# Altium PCB wifi_car.PcbDoc (part 2 of 5)
Units mm, origin at the board's own origin, x right, y up, seen from the top; angles counter-clockwise.
Board outline 68.55 x 80.89 mm, 2 copper layers (Top Layer, Bottom Layer); 133 components, 98 nets, 473 pads, 106 vias.
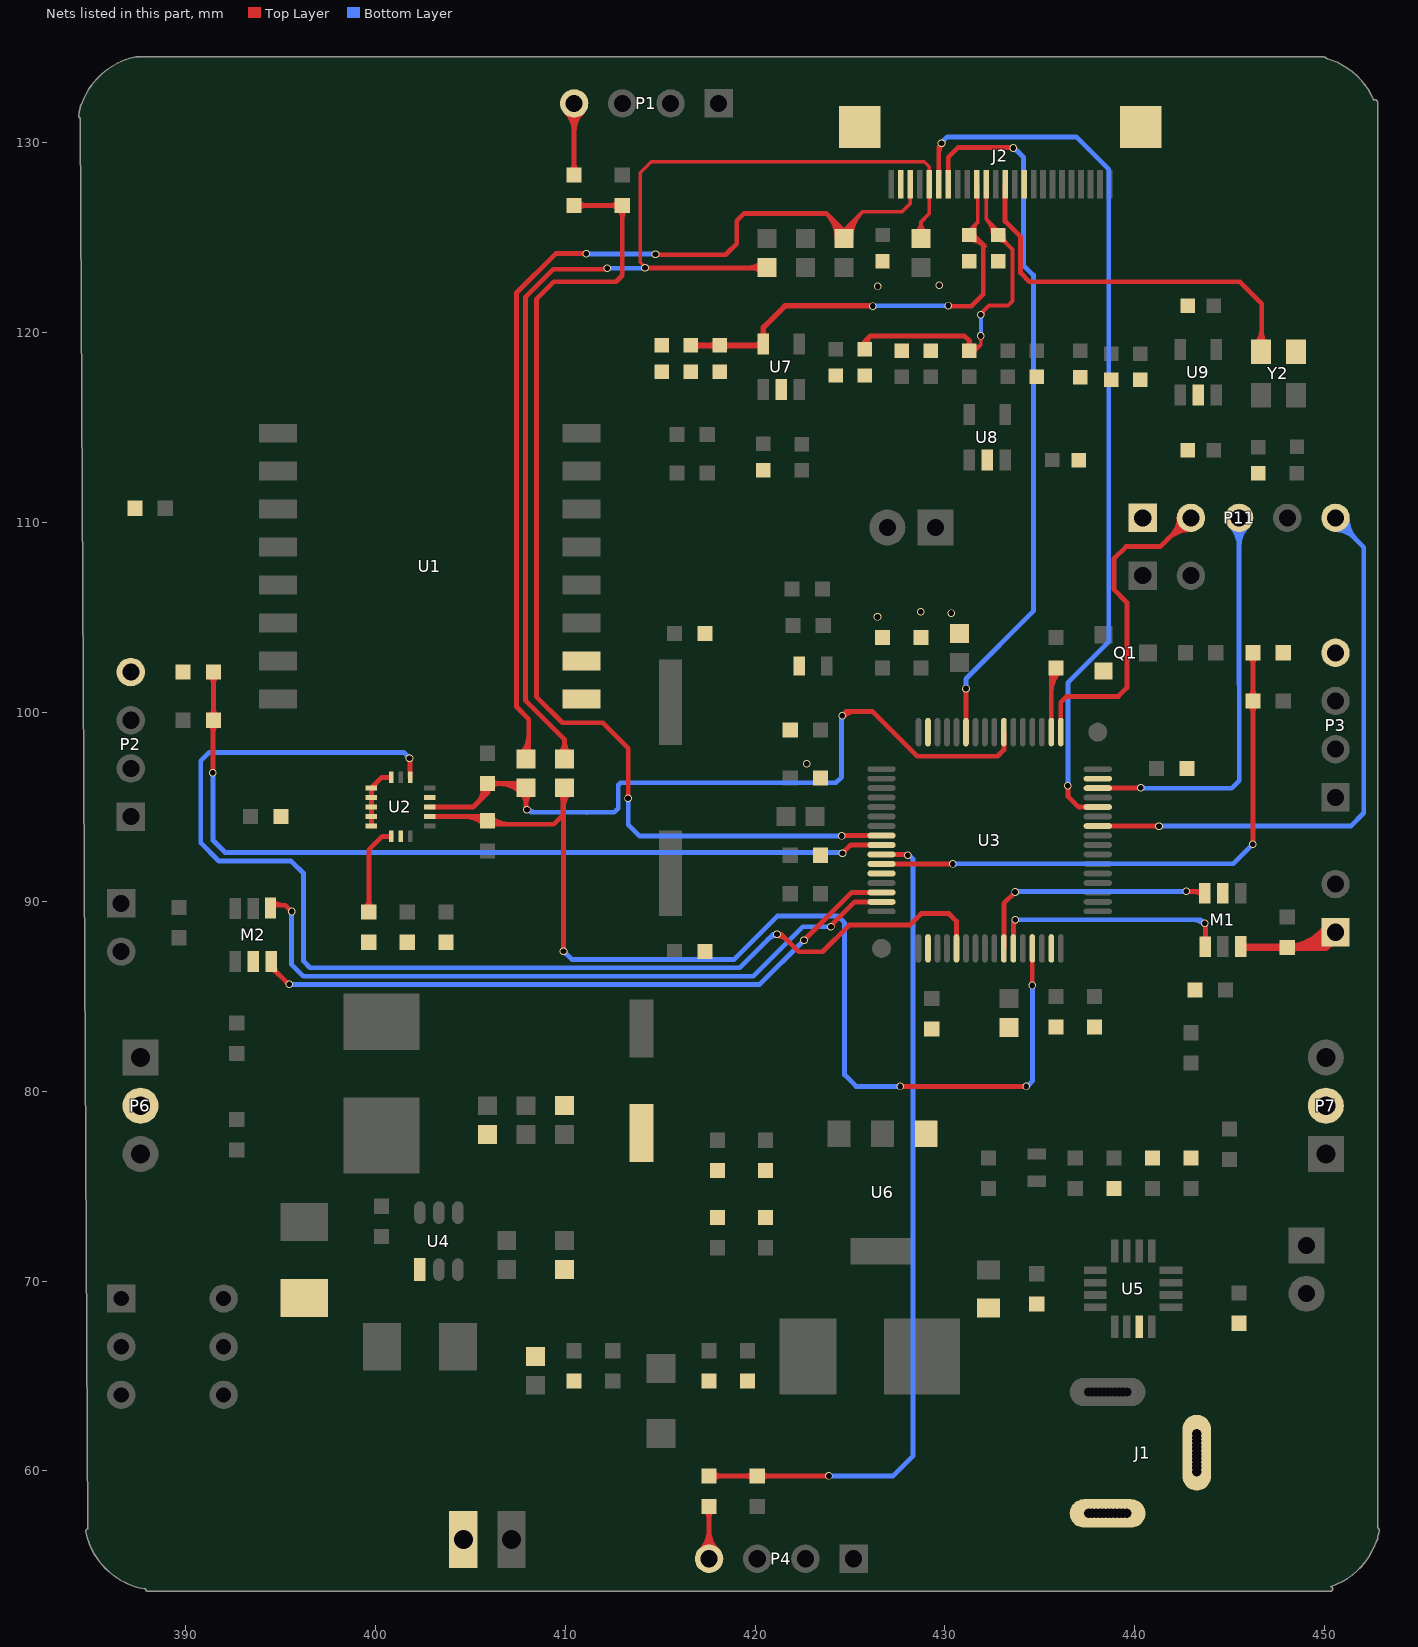
[diagram p2: the nets of this part, all layers, seen from the top]

## Via types
v1: diameter 0.4, hole 0.3, Top Layer to Bottom Layer, 101 vias
v2: diameter 5, hole 4.8, Top Layer to Bottom Layer, 4 vias
v3: diameter 0.6, hole 0.5, Top Layer to Bottom Layer, 1 vias

## Nets (pads, with @x,y where several pads share a name; then routed paths per layer and width w, separated by ;. In a path a pad name is that pad's centre, name@x,y a point inside that pad or via, vN(x,y) a via of type N, cw(c..) or ccw(c..) an arc to the next point about the centre after c; other vN are vias at no path point) (continued)
DCMI_RESET: J2.6 U3.44 | length 50.1
  Top Layer w0.254: J2.6@429.682,127.822 429.682,129.78 v1@429.879,129.977 ; v1@436.488,96.082 436.488,95.553 437.042,95 U3.44@437.438,95 ; U3.44@437.398,95.028 U3.44@437.85,95.028 ; U3.44@437.57,95.014 438.045,95.014 U3.44@438.066,94.993 ; 429.682,129.451 cw(c430.352,129.451) v1@429.879,129.925 ; 429.682,129.451 cw(c430.352,129.451) v1@429.879,129.925 ; 429.682,129.451 cw(c430.352,129.451) v1@429.879,129.925
  Bottom Layer w0.254: v1@429.818,129.999 430.135,130.317 436.93,130.317 438.646,128.601 438.646,124.55 438.648,124.549 438.648,103.702 436.493,101.547 436.493,96.129 v1@436.474,96.11 ; v1@429.9,129.977 cw(c430.153,129.977) 429.974,130.156 ; v1@429.9,129.977 cw(c430.153,129.977) 429.974,130.156 ; v1@429.9,129.977 cw(c430.153,129.977) 429.974,130.156
  other v1: 436.484,96.12 429.827,129.977
DCMI_SCL: J2.5 R22.1 R25.1 R26.1 | length 76.5
  Top Layer w0.2: v1@414.219,123.432 413.946,123.705 413.946,128.425 414.531,129.011 428.919,129.011 429.182,128.747 J2.5@429.182,127.822 ; R25.1@420.372,123.493 R25.1@420.432,123.493 ; R26.1@428.743,125.097 428.743,125.838 ; J2.5@429.176,127.828 J2.5@429.182,127.822 ; R26.1@428.488,125.265 ccw(c427.971,125.838) 428.743,125.838 ; R26.1@428.488,125.265 ccw(c427.971,125.838) 428.743,125.838 ; R26.1@428.488,125.265 ccw(c427.971,125.838) 428.743,125.838 ; 428.743,125.838 ccw(c429.467,125.838) R26.1@429.009,125.277 ; 428.743,125.838 ccw(c429.467,125.838) R26.1@429.009,125.277 ; 428.743,125.838 ccw(c429.467,125.838) R26.1@429.009,125.277 ; 428.743,125.838 429.182,126.278 J2.5@429.182,127.822
  Top Layer w0.254: R22.1@409.959,97.536 409.959,98.545 407.893,100.612 407.893,121.865 409.368,123.34 v1@412.168,123.34 ; v1(414.201,123.413) R25.1@420.372,123.413 ; R22.1@409.696,97.799 ccw(c409.059,98.436) 409.959,98.436 ; R22.1@409.696,97.799 ccw(c409.059,98.436) 409.959,98.436 ; R22.1@409.696,97.799 ccw(c409.059,98.436) 409.959,98.436 ; 409.959,98.436 ccw(c410.86,98.436) R22.1@410.223,97.799 ; 409.959,98.436 ccw(c410.86,98.436) R22.1@410.223,97.799 ; 409.959,98.436 ccw(c410.86,98.436) R22.1@410.223,97.799 ; 411.897,123.34 ccw(c411.897,123.702) v1@412.153,123.446 ; 411.897,123.34 ccw(c411.897,123.702) v1@412.153,123.446 ; 411.897,123.34 ccw(c411.897,123.702) v1@412.153,123.446 ; 419.643,123.413 ccw(c419.643,124.421) R25.1@420.357,123.708 ; 419.643,123.413 ccw(c419.643,124.421) R25.1@420.357,123.708 ; 419.643,123.413 ccw(c419.643,124.421) R25.1@420.357,123.708 ; 419.797,123.413 cw(c419.797,122.62) R25.1@420.357,123.181 ; 419.797,123.413 cw(c419.797,122.62) R25.1@420.357,123.181 ; 419.797,123.413 cw(c419.797,122.62) R25.1@420.357,123.181
  Bottom Layer w0.254: v1(412.204,123.394) v1@414.146,123.394 ; 413.981,123.394 ccw(c413.981,123.633) v1@414.149,123.464 ; 413.981,123.394 ccw(c413.981,123.633) v1@414.149,123.464 ; 413.981,123.394 ccw(c413.981,123.633) v1@414.149,123.464
DCMI_SDA: J2.3 R19.1 R20.1 | length 75.4
  Top Layer w0.2: R20.1@424.741,125.449 425.662,126.369 ; J2.3@428.182,127.822 428.182,126.797 427.754,126.369 425.662,126.369 ; R20.1@424.691,124.968 cw(c425.707,124.979) 424.989,125.697 ; R20.1@424.691,124.968 cw(c425.707,124.979) 424.989,125.697 ; R20.1@424.691,124.968 cw(c425.707,124.979) 424.989,125.697 ; R20.1@424.891,124.97 cw(c426.372,124.986) 425.325,126.033 ; R20.1@424.891,124.97 cw(c426.372,124.986) 425.325,126.033 ; R20.1@424.891,124.97 cw(c426.372,124.986) 425.325,126.033 ; R20.1@425.091,124.972 cw(c427.038,124.993) 425.662,126.369 ; R20.1@425.091,124.972 cw(c427.038,124.993) 425.662,126.369 ; R20.1@425.091,124.972 cw(c427.038,124.993) 425.662,126.369
  Top Layer w0.254: R19.1@407.927,97.536 408.07,97.678 408.07,99.625 407.426,100.268 407.426,122.099 409.492,124.165 v1@410.953,124.165 ; v1@414.721,124.109 418.445,124.109 ; 418.464,124.119 419.032,124.687 419.032,125.889 419.414,126.271 423.776,126.271 R20.1@424.765,125.282 ; R19.1@407.664,97.799 ccw(c406.683,98.78) 408.07,98.78 ; R19.1@407.664,97.799 ccw(c406.683,98.78) 408.07,98.78 ; R19.1@407.664,97.799 ccw(c406.683,98.78) 408.07,98.78 ; R19.1@407.843,97.62 ccw(c407.297,98.166) 408.07,98.166 ; R19.1@407.843,97.62 ccw(c407.297,98.166) 408.07,98.166 ; R19.1@407.843,97.62 ccw(c407.297,98.166) 408.07,98.166 ; 408.07,98.093 ccw(c408.484,98.093) R19.1@408.191,97.799 ; 408.07,98.093 ccw(c408.484,98.093) R19.1@408.191,97.799 ; 408.07,98.093 ccw(c408.484,98.093) R19.1@408.191,97.799 ; v1@414.805,124.18 ccw(c414.976,124.351) 414.976,124.109 ; v1@414.805,124.18 ccw(c414.976,124.351) 414.976,124.109 ; v1@414.805,124.18 ccw(c414.976,124.351) 414.976,124.109 ; 423.78,126.267 cw(c422.481,124.968) R20.1@424.318,124.968 ; 423.78,126.267 cw(c422.481,124.968) R20.1@424.318,124.968 ; 423.78,126.267 cw(c422.481,124.968) R20.1@424.318,124.968 ; 424.214,125.833 cw(c423.348,124.968) R20.1@424.572,124.968 ; 424.214,125.833 cw(c423.348,124.968) R20.1@424.572,124.968 ; 424.214,125.833 cw(c423.348,124.968) R20.1@424.572,124.968
  Bottom Layer w0.254: v1@411.168,124.15 v1@414.703,124.15 ; v1@411.157,124.217 ccw(c411.317,124.377) 411.317,124.15 ; v1@411.157,124.217 ccw(c411.317,124.377) 411.317,124.15 ; v1@411.157,124.217 ccw(c411.317,124.377) 411.317,124.15 ; 414.525,124.15 cw(c414.525,123.9) v1@414.702,124.077 ; 414.525,124.15 cw(c414.525,123.9) v1@414.702,124.077 ; 414.525,124.15 cw(c414.525,123.9) v1@414.702,124.077
  other v1: 414.753,124.129 411.105,124.165
DCMI_VSYNC: J2.7 U3.59 | length 39
  Top Layer w0.254: J2.7@430.182,127.822 430.182,129.242 430.695,129.755 v1@433.66,129.755 ; U3.59@431.116,98.943 v1@431.116,101.191 ; 433.382,129.755 cw(c433.382,129.5) v1@433.563,129.68 ; 433.382,129.755 cw(c433.382,129.5) v1@433.563,129.68 ; 433.382,129.755 cw(c433.382,129.5) v1@433.563,129.68
  Bottom Layer w0.254: v1(431.118,101.237) 431.118,101.757 434.675,105.314 434.675,123.031 434.146,123.561 434.146,126.313 434.149,126.315 434.149,129.235 v1@433.676,129.709 ; v1@433.614,129.659 cw(c433.614,129.39) 433.804,129.58 ; v1@433.614,129.659 cw(c433.614,129.39) 433.804,129.58 ; v1@433.614,129.659 cw(c433.614,129.39) 433.804,129.58
  other v1: 433.614,129.732
DCMI_XCLK: J2.13 Y2.3 | length 25.2
  Top Layer w0.254: J2.13@433.182,127.822 433.182,125.863 433.994,125.051 433.994,123.145 434.461,122.678 445.554,122.678 446.707,121.526 Y2.3@446.707,119.206 ; Y2.3@446.382,119.403 ccw(c445.599,120.186) 446.707,120.186 ; Y2.3@446.382,119.403 ccw(c445.599,120.186) 446.707,120.186 ; Y2.3@446.382,119.403 ccw(c445.599,120.186) 446.707,120.186 ; 446.707,119.978 ccw(c447.521,119.978) Y2.3@446.945,119.403 ; 446.707,119.978 ccw(c447.521,119.978) Y2.3@446.945,119.403 ; 446.707,119.978 ccw(c447.521,119.978) Y2.3@446.945,119.403
DEBUG_LOG: P11.5 U3.42 | length 38.1
  Top Layer w0.254: U3.42@438.066,93.993 v1@441.306,93.993 ; 441.08,93.993 cw(c441.08,93.768) 441.239,93.927 ccw(c441.08,93.768) 441.08,93.993
  Bottom Layer w0.254: v1@441.285,93.987 451.393,93.987 452.087,94.68 452.087,108.686 P11.5@450.717,110.056 ; P11.5@450.596,109.613 cw(c450.596,108.251) 451.559,109.214 ccw(c450.596,108.251) P11.5@450.596,109.613 ; P11.5@450.596,109.867 cw(c450.596,109.119) 451.125,109.648 ccw(c450.596,109.119) P11.5@450.596,109.867 ; P11.5@450.965,110.236 ccw(c451.998,110.236) 451.268,109.505 cw(c451.998,110.236) P11.5@450.965,110.236 ; P11.5@451.219,110.236 ccw(c452.865,110.236) 451.701,109.072 cw(c452.865,110.236) P11.5@451.219,110.236
  other v1: 441.29,93.978
DOVDD_2V8: C40.1 C43.2 J2.11 R47.1 | length 39.3
  Top Layer w0.2: R47.1@431.296,119.405 R47.1@431.303,119.412 ; R47.1@431.529,118.984 431.897,119.352 ; v1@431.859,119.761 v1@431.859,119.855 ; v1(431.897,119.825) 431.897,119.352 ; v1@431.912,121.012 432.331,121.431 433.347,121.431 433.576,121.66 433.576,124.386 C40.1@432.816,125.146 ; J2.11@432.182,127.822 432.182,125.983 C40.1@432.909,125.257 ; R47.1@431.333,119.12 ccw(c431.492,119.391) 431.714,119.169 ; R47.1@431.333,119.12 ccw(c431.492,119.391) 431.714,119.169 ; R47.1@431.333,119.12 ccw(c431.492,119.391) 431.714,119.169 ; R47.1@431.434,119.292 ccw(c431.627,119.622) 431.897,119.352 ; R47.1@431.434,119.292 ccw(c431.627,119.622) 431.897,119.352 ; R47.1@431.434,119.292 ccw(c431.627,119.622) 431.897,119.352 ; v1@431.826,119.755 cw(c431.656,119.584) 431.897,119.584 ; v1@431.826,119.755 cw(c431.656,119.584) 431.897,119.584 ; v1@431.826,119.755 cw(c431.656,119.584) 431.897,119.584 ; 431.897,119.584 cw(c432.138,119.584) v1@431.968,119.755 ; 431.897,119.584 cw(c432.138,119.584) v1@431.968,119.755 ; 431.897,119.584 cw(c432.138,119.584) v1@431.968,119.755 ; v1@432.004,120.937 cw(c432.409,120.937) 432.123,121.223 ; v1@432.004,120.937 cw(c432.409,120.937) 432.123,121.223 ; v1@432.004,120.937 cw(c432.409,120.937) 432.123,121.223 ; 432.192,125.973 cw(c431.365,125.146) C40.1@432.535,125.146 ; 432.192,125.973 cw(c431.365,125.146) C40.1@432.535,125.146 ; 432.192,125.973 cw(c431.365,125.146) C40.1@432.535,125.146 ; 432.534,125.632 cw(c432.048,125.146) C40.1@432.735,125.146 ; 432.534,125.632 cw(c432.048,125.146) C40.1@432.735,125.146 ; 432.534,125.632 cw(c432.048,125.146) C40.1@432.735,125.146 ; C40.1@432.816,124.865 cw(c432.816,124.186) 433.296,124.666 ; C40.1@432.816,124.865 cw(c432.816,124.186) 433.296,124.666 ; C40.1@432.816,124.865 cw(c432.816,124.186) 433.296,124.666 ; C40.1@433.097,125.146 ccw(c433.775,125.146) 433.296,124.666 ; C40.1@433.097,125.146 ccw(c433.775,125.146) 433.296,124.666 ; C40.1@433.097,125.146 ccw(c433.775,125.146) 433.296,124.666
  Top Layer w0.254: R47.1@431.303,119.073 431.303,119.412 431.303,119.56 ; C43.2@425.669,119.347 ccw(c425.559,119.549) 425.789,119.549 ; C43.2@425.669,119.347 ccw(c425.559,119.549) 425.789,119.549 ; C43.2@425.669,119.347 ccw(c425.559,119.549) 425.789,119.549 ; C43.2@425.789,119.123 cw(c426.116,119.33) 425.843,119.603 ; C43.2@425.789,119.123 cw(c426.116,119.33) 425.843,119.603 ; C43.2@425.789,119.123 cw(c426.116,119.33) 425.843,119.603 ; C43.2@425.789,119.123 425.789,119.549 ; 425.789,119.549 ccw(c426.019,119.549) C43.2@425.91,119.347 ; 425.789,119.549 ccw(c426.019,119.549) C43.2@425.91,119.347 ; 425.789,119.549 ccw(c426.019,119.549) C43.2@425.91,119.347 ; 425.789,119.549 426.067,119.827 ; C43.2@426.004,119.259 cw(c426.391,119.503) 426.067,119.827 ; C43.2@426.004,119.259 cw(c426.391,119.503) 426.067,119.827 ; C43.2@426.004,119.259 cw(c426.391,119.503) 426.067,119.827 ; 426.067,119.827 431.036,119.827 431.303,119.56 ; R47.1@431.146,119.258 ccw(c430.933,119.56) 431.303,119.56 ; R47.1@431.146,119.258 ccw(c430.933,119.56) 431.303,119.56 ; R47.1@431.146,119.258 ccw(c430.933,119.56) 431.303,119.56 ; 431.303,119.56 ccw(c431.707,119.56) R47.1@431.452,119.247 ; 431.303,119.56 ccw(c431.707,119.56) R47.1@431.452,119.247 ; 431.303,119.56 ccw(c431.707,119.56) R47.1@431.452,119.247
  Bottom Layer w0.2: v1@431.912,119.742 v1@431.912,120.927 ; v1@431.826,119.896 ccw(c431.62,120.102) 431.912,120.102 ; v1@431.826,119.896 ccw(c431.62,120.102) 431.912,120.102 ; v1@431.826,119.896 ccw(c431.62,120.102) 431.912,120.102 ; v1@431.834,120.866 cw(c431.646,120.679) 431.912,120.679 ; v1@431.834,120.866 cw(c431.646,120.679) 431.912,120.679 ; v1@431.834,120.866 cw(c431.646,120.679) 431.912,120.679 ; 431.912,120.031 ccw(c432.103,120.031) v1@431.968,119.896 ; 431.912,120.031 ccw(c432.103,120.031) v1@431.968,119.896 ; 431.912,120.031 ccw(c432.103,120.031) v1@431.968,119.896 ; 431.912,120.713 cw(c432.129,120.713) v1@431.975,120.866 ; 431.912,120.713 cw(c432.129,120.713) v1@431.975,120.866 ; 431.912,120.713 cw(c432.129,120.713) v1@431.975,120.866
  other v1: 431.904,120.937
DVDD_1V5: C36.2 C37.2 C38.1 J2.10 U7.5 | length 42.9
  Top Layer w0.2: C38.1@431.421,125.511 431.741,125.832 ; J2.10@431.682,127.822 431.741,127.763 431.741,125.832 ; C38.1@431.371,125.165 cw(c431.8,125.267) 431.488,125.579 ; C38.1@431.371,125.165 cw(c431.8,125.267) 431.488,125.579 ; C38.1@431.371,125.165 cw(c431.8,125.267) 431.488,125.579 ; C38.1@431.565,125.211 cw(c432.208,125.364) 431.741,125.832 ; C38.1@431.565,125.211 cw(c432.208,125.364) 431.741,125.832 ; C38.1@431.565,125.211 cw(c432.208,125.364) 431.741,125.832 ; J2.10@431.647,127.187 cw(c431.42,126.96) 431.741,126.96 ; J2.10@431.647,127.187 cw(c431.42,126.96) 431.741,126.96 ; J2.10@431.647,127.187 cw(c431.42,126.96) 431.741,126.96
  Top Layer w0.254: v1@430.221,121.391 431.403,121.391 432.027,122.015 432.027,124.631 431.512,125.146 C38.1@431.292,125.146 ; v1@430.237,121.479 ccw(c430.449,121.691) 430.449,121.391 ; v1@430.237,121.479 ccw(c430.449,121.691) 430.449,121.391 ; v1@430.237,121.479 ccw(c430.449,121.691) 430.449,121.391 ; C38.1@431.292,124.892 cw(c431.292,123.748) 432.101,124.557 ; C38.1@431.292,124.892 cw(c431.292,123.748) 432.101,124.557 ; C38.1@431.292,124.892 cw(c431.292,123.748) 432.101,124.557 ; C38.1@431.292,125.146 cw(c431.292,124.616) C38.1@431.667,124.991 ; C38.1@431.292,125.146 cw(c431.292,124.616) C38.1@431.667,124.991 ; C38.1@431.292,125.146 cw(c431.292,124.616) C38.1@431.667,124.991
  Top Layer w0.3: C37.2@416.612,119.325 C36.2@417.934,119.325 ; C36.2@418.136,119.325 U7.5@420.212,119.325 ; U7.5@420.44,119.393 420.44,120.273 421.576,121.409 v1@426.195,121.409 ; C37.2@416.775,119.161 cw(c417.17,118.767) 417.17,119.325 ; C37.2@416.775,119.161 cw(c417.17,118.767) 417.17,119.325 ; C37.2@416.775,119.161 cw(c417.17,118.767) 417.17,119.325 ; C37.2@416.775,119.488 ccw(c417.17,119.882) 417.17,119.325 ; C37.2@416.775,119.488 ccw(c417.17,119.882) 417.17,119.325 ; C37.2@416.775,119.488 ccw(c417.17,119.882) 417.17,119.325 ; 417.578,119.325 ccw(c417.578,119.882) C36.2@417.973,119.488 ; 417.578,119.325 cw(c417.578,118.767) C36.2@417.973,119.161 ; 417.578,119.325 ccw(c417.578,119.882) C36.2@417.973,119.488 ; 417.578,119.325 cw(c417.578,118.767) C36.2@417.973,119.161 ; 417.578,119.325 ccw(c417.578,119.882) C36.2@417.973,119.488 ; 417.578,119.325 cw(c417.578,118.767) C36.2@417.973,119.161 ; C36.2@418.299,119.161 cw(c418.694,118.767) 418.694,119.325 ; C36.2@418.299,119.161 cw(c418.694,118.767) 418.694,119.325 ; C36.2@418.299,119.161 cw(c418.694,118.767) 418.694,119.325 ; C36.2@418.299,119.488 ccw(c418.694,119.882) 418.694,119.325 ; C36.2@418.299,119.488 ccw(c418.694,119.882) 418.694,119.325 ; C36.2@418.299,119.488 ccw(c418.694,119.882) 418.694,119.325 ; 419.912,119.325 ccw(c419.912,119.921) U7.5@420.334,119.499 ; 419.912,119.325 ccw(c419.912,119.921) U7.5@420.334,119.499 ; 419.912,119.325 ccw(c419.912,119.921) U7.5@420.334,119.499 ; U7.5@420.334,119.749 ccw(c420.078,120.006) 420.44,120.006 ; U7.5@420.334,119.749 ccw(c420.078,120.006) 420.44,120.006 ; U7.5@420.334,119.749 ccw(c420.078,120.006) 420.44,120.006 ; 420.44,120.006 ccw(c420.802,120.006) U7.5@420.546,119.749 ; 420.44,120.006 ccw(c420.802,120.006) U7.5@420.546,119.749 ; 420.44,120.006 ccw(c420.802,120.006) U7.5@420.546,119.749
  Bottom Layer w0.254: v1@426.196,121.42 v1@430.145,121.42 ; v1@426.255,121.348 cw(c426.428,121.175) 426.428,121.42 ; v1@426.255,121.348 cw(c426.428,121.175) 426.428,121.42 ; v1@426.255,121.348 cw(c426.428,121.175) 426.428,121.42
  other v1: 426.204,121.4 430.185,121.427
ECHO_B: R10.1 R12.2 U3.10 | length 54.3
  Top Layer w0.254: R12.2@417.576,59.728 R10.1@420.156,59.728 ; R10.1@420.116,59.728 v1@423.836,59.728 ; U3.10@426.666,92.493 v1@427.943,92.493 ; R12.2@417.769,59.535 cw(c418.235,59.069) 418.235,59.728 ; R12.2@417.769,59.535 cw(c418.235,59.069) 418.235,59.728 ; R12.2@417.769,59.535 cw(c418.235,59.069) 418.235,59.728 ; R12.2@417.769,59.921 ccw(c418.235,60.387) 418.235,59.728 ; R12.2@417.769,59.921 ccw(c418.235,60.387) 418.235,59.728 ; R12.2@417.769,59.921 ccw(c418.235,60.387) 418.235,59.728 ; 419.457,59.728 ccw(c419.457,60.387) R10.1@419.923,59.921 ; 419.457,59.728 cw(c419.457,59.069) R10.1@419.923,59.535 ; 419.457,59.728 ccw(c419.457,60.387) R10.1@419.923,59.921 ; 419.457,59.728 cw(c419.457,59.069) R10.1@419.923,59.535 ; 419.457,59.728 ccw(c419.457,60.387) R10.1@419.923,59.921 ; 419.457,59.728 cw(c419.457,59.069) R10.1@419.923,59.535 ; R10.1@420.309,59.535 cw(c420.775,59.069) 420.775,59.728 ; R10.1@420.309,59.535 cw(c420.775,59.069) 420.775,59.728 ; R10.1@420.309,59.535 cw(c420.775,59.069) 420.775,59.728 ; R10.1@420.309,59.921 ccw(c420.775,60.387) 420.775,59.728 ; R10.1@420.309,59.921 ccw(c420.775,60.387) 420.775,59.728 ; R10.1@420.309,59.921 ccw(c420.775,60.387) 420.775,59.728 ; 427.782,92.493 cw(c427.782,92.185) v1@428,92.402 ; 427.782,92.493 cw(c427.782,92.185) v1@428,92.402 ; 427.782,92.493 cw(c427.782,92.185) v1@428,92.402
  Bottom Layer w0.254: v1(423.895,59.735) 427.284,59.735 428.321,60.772 428.321,92.261 v1@428.095,92.487
  other v1: 428.052,92.454
ECHO_F: R3.1 R6.2 U3.8 | length 66.6
  Top Layer w0.254: R6.2@410.464,126.708 R3.1@413.004,126.708 ; R3.1@413.254,126.708 R3.1@413.004,126.708 ; v1@413.316,95.461 413.316,98.097 411.981,99.432 409.85,99.432 408.475,100.807 408.475,121.753 409.399,122.677 412.669,122.677 413.004,123.012 R3.1@413.004,126.708 ; v1@424.571,93.486 U3.8@426.296,93.486 ; R6.2@410.657,126.515 cw(c411.123,126.049) 411.123,126.708 ; R6.2@410.657,126.515 cw(c411.123,126.049) 411.123,126.708 ; R6.2@410.657,126.515 cw(c411.123,126.049) 411.123,126.708 ; R6.2@410.657,126.901 ccw(c411.123,127.367) 411.123,126.708 ; R6.2@410.657,126.901 ccw(c411.123,127.367) 411.123,126.708 ; R6.2@410.657,126.901 ccw(c411.123,127.367) 411.123,126.708 ; 412.345,126.708 ccw(c412.345,127.367) R3.1@412.811,126.901 ; 412.345,126.708 cw(c412.345,126.049) R3.1@412.811,126.515 ; 412.345,126.708 ccw(c412.345,127.367) R3.1@412.811,126.901 ; 412.345,126.708 cw(c412.345,126.049) R3.1@412.811,126.515 ; 412.345,126.708 ccw(c412.345,127.367) R3.1@412.811,126.901 ; 412.345,126.708 cw(c412.345,126.049) R3.1@412.811,126.515 ; R3.1@412.811,126.515 cw(c412.345,126.049) 413.004,126.049 ; R3.1@412.811,126.515 cw(c412.345,126.049) 413.004,126.049 ; R3.1@412.811,126.515 cw(c412.345,126.049) 413.004,126.049 ; 413.004,126.049 cw(c413.663,126.049) R3.1@413.197,126.515 ; 413.004,126.049 cw(c413.663,126.049) R3.1@413.197,126.515 ; 413.004,126.049 cw(c413.663,126.049) R3.1@413.197,126.515 ; v1@413.254,95.51 ccw(c413.105,95.659) 413.316,95.659 ; v1@413.254,95.51 ccw(c413.105,95.659) 413.316,95.659 ; v1@413.254,95.51 ccw(c413.105,95.659) 413.316,95.659 ; v1@424.615,93.419 cw(c424.779,93.255) 424.779,93.486 ; v1@424.615,93.419 cw(c424.779,93.255) 424.779,93.486 ; v1@424.615,93.419 cw(c424.779,93.255) 424.779,93.486
  Bottom Layer w0.254: v1@413.32,95.426 413.32,94.049 413.898,93.47 v1(424.563,93.47) ; v1@413.254,95.407 cw(c413.095,95.248) 413.32,95.248 ; v1@413.254,95.407 cw(c413.095,95.248) 413.32,95.248 ; v1@413.254,95.407 cw(c413.095,95.248) 413.32,95.248
  other v1: 413.306,95.458
ECHO_L: R4.1 R7.2 U3.9 | length 55.2
  Top Layer w0.254: v1@391.429,96.88 R4.1@391.429,99.473 ; R4.1@391.452,99.568 R7.2@391.452,101.793 ; v1@424.625,92.578 425.046,93 U3.9@426.747,93 ; R4.1@391.259,99.375 cw(c390.849,98.965) 391.429,98.965 ; R4.1@391.259,99.375 cw(c390.849,98.965) 391.429,98.965 ; R4.1@391.259,99.375 cw(c390.849,98.965) 391.429,98.965 ; R4.1@391.259,99.761 ccw(c390.793,100.227) 391.452,100.227 ; R4.1@391.259,99.761 ccw(c390.793,100.227) 391.452,100.227 ; R4.1@391.259,99.761 ccw(c390.793,100.227) 391.452,100.227 ; R7.2@391.259,101.915 cw(c390.793,101.449) 391.452,101.449 ; R7.2@391.259,101.915 cw(c390.793,101.449) 391.452,101.449 ; R7.2@391.259,101.915 cw(c390.793,101.449) 391.452,101.449 ; v1@391.364,96.846 ccw(c391.209,97.002) 391.429,97.002 ; v1@391.364,96.846 ccw(c391.209,97.002) 391.429,97.002 ; v1@391.364,96.846 ccw(c391.209,97.002) 391.429,97.002 ; 391.429,98.852 cw(c392.168,98.852) R4.1@391.645,99.375 ; 391.429,98.852 cw(c392.168,98.852) R4.1@391.645,99.375 ; 391.429,98.852 cw(c392.168,98.852) R4.1@391.645,99.375 ; 391.452,100.227 ccw(c392.111,100.227) R4.1@391.645,99.761 ; 391.452,100.227 ccw(c392.111,100.227) R4.1@391.645,99.761 ; 391.452,100.227 ccw(c392.111,100.227) R4.1@391.645,99.761 ; 391.452,101.449 cw(c392.111,101.449) R7.2@391.645,101.915 ; 391.452,101.449 cw(c392.111,101.449) R7.2@391.645,101.915 ; 391.452,101.449 cw(c392.111,101.449) R7.2@391.645,101.915
  Bottom Layer w0.254: v1@391.429,96.758 391.429,93.236 392.062,92.603 v1@424.614,92.603 ; v1@391.364,96.743 cw(c391.207,96.586) 391.429,96.586 ; v1@391.364,96.743 cw(c391.207,96.586) 391.429,96.586 ; v1@391.364,96.743 cw(c391.207,96.586) 391.429,96.586 ; 424.321,92.603 cw(c424.321,92.271) v1@424.556,92.506 ; 424.321,92.603 cw(c424.321,92.271) v1@424.556,92.506 ; 424.321,92.603 cw(c424.321,92.271) v1@424.556,92.506
  other v1: 424.607,92.557 391.416,96.795
ECHO_R: R9.1 R11.2 U3.11 | length 40.4
  Top Layer w0.254: U3.11@426.666,91.993 v1@430.452,91.993 ; v1@446.24,93.034 R9.1@446.24,100.584 ; R9.1@446.24,100.597 R11.2@446.24,103.124 ; R9.1@446.047,100.391 cw(c445.581,99.925) 446.24,99.925 ; R9.1@446.047,100.391 cw(c445.581,99.925) 446.24,99.925 ; R9.1@446.047,100.391 cw(c445.581,99.925) 446.24,99.925 ; R9.1@446.047,100.777 ccw(c445.581,101.243) 446.24,101.243 ; R9.1@446.047,100.777 ccw(c445.581,101.243) 446.24,101.243 ; R9.1@446.047,100.777 ccw(c445.581,101.243) 446.24,101.243 ; R11.2@446.047,102.931 cw(c445.581,102.465) 446.24,102.465 ; R11.2@446.047,102.931 cw(c445.581,102.465) 446.24,102.465 ; R11.2@446.047,102.931 cw(c445.581,102.465) 446.24,102.465 ; v1@446.176,93.076 ccw(c446.021,93.23) 446.24,93.23 ; v1@446.176,93.076 ccw(c446.021,93.23) 446.24,93.23 ; v1@446.176,93.076 ccw(c446.021,93.23) 446.24,93.23 ; 446.24,99.925 cw(c446.899,99.925) R9.1@446.433,100.391 ; 446.24,99.925 cw(c446.899,99.925) R9.1@446.433,100.391 ; 446.24,99.925 cw(c446.899,99.925) R9.1@446.433,100.391 ; 446.24,101.243 ccw(c446.899,101.243) R9.1@446.433,100.777 ; 446.24,101.243 ccw(c446.899,101.243) R9.1@446.433,100.777 ; 446.24,101.243 ccw(c446.899,101.243) R9.1@446.433,100.777 ; 446.24,102.465 cw(c446.899,102.465) R11.2@446.433,102.931 ; 446.24,102.465 cw(c446.899,102.465) R11.2@446.433,102.931 ; 446.24,102.465 cw(c446.899,102.465) R11.2@446.433,102.931
  Bottom Layer w0.254: v1@430.423,92.006 445.209,92.006 v1@446.193,92.989 ; v1@430.475,91.943 cw(c430.628,91.79) 430.628,92.006 ; v1@430.475,91.943 cw(c430.628,91.79) 430.628,92.006 ; v1@430.475,91.943 cw(c430.628,91.79) 430.628,92.006
  other v1: 430.423,91.994 446.228,93.024
GND: C1.1 C2.2 C3.2 C4.1 C5.1 C7.2 C9.1 C10.1 C11.1 C12.1 C13.1 C14.1 C15.1 C16.1 C17.1 C18.1 C19.1 C21.1 C22.2 C23.2 C24.2 C25.2 C26.1 C27.1 C28.1 C29.2 C30.2 C31.2 C32.2 C33.2 C34.2 C35.1 C36.1 C37.1 C38.2 C39.1 C40.2 C41.2 C42.1 C43.1 C44.1 C45.1 C46.1 C47.1 C48.1 C49.1 C50.1 CE1.2 D1.2 D3.1 J1.2 J1.3 J2.2 J2.15 J2.25 J2.26 M1.2 M2.2 P1.4 P2.4 P3.4 P4.4 P6.2 P7.2 P11.1 P14.1 Q1.2 R6.1 R7.1 R11.1 R12.1 R29.1 R30.2 R34.2 R38.1 R39.1 R40.1 R41.2 R44.1 R44.2 U1.9 U1.10 U2.4 U2.8 U2.9 U2.10 U2.11 U2.12 U2.13 U2.15 U3.12 U3.18 U3.31 U3.47 U3.63 U4.1 U5.7 U6.1 U7.2 U8.2 U9.2 Y2.2 | length 39.9
  Top Layer w0.254: U2.13@399.785,94.001 399.785,95.496 399.785,95.976 U2.9@399.765,95.996 400.325,96.556 U2.8@400.771,96.556 ; R6.1@410.34,128.432 R6.1@410.464,128.308 ; R6.1@410.464,128.279 R6.1@410.464,128.308 ; P1.4@410.464,132.08 R6.1@410.464,128.308 ; R12.1@417.473,58.209 417.576,58.106 P4.4@417.576,55.372 ; U2.9@399.938,95.996 cw(c400.356,95.996) 400.06,96.291 ; U2.9@399.938,95.996 cw(c400.356,95.996) 400.06,96.291 ; U2.9@399.938,95.996 cw(c400.356,95.996) 400.06,96.291 ; P1.4@410.023,131.639 cw(c408.96,130.576) 410.464,130.576 ; P1.4@410.023,131.639 cw(c408.96,130.576) 410.464,130.576 ; P1.4@410.023,131.639 cw(c408.96,130.576) 410.464,130.576 ; P1.4@410.203,131.819 cw(c409.573,131.189) 410.464,131.189 ; P1.4@410.203,131.819 cw(c409.573,131.189) 410.464,131.189 ; P1.4@410.203,131.819 cw(c409.573,131.189) 410.464,131.189 ; R6.1@410.271,128.501 ccw(c409.805,128.967) 410.464,128.967 ; R6.1@410.271,128.501 ccw(c409.805,128.967) 410.464,128.967 ; R6.1@410.271,128.501 ccw(c409.805,128.967) 410.464,128.967 ; 410.464,128.967 ccw(c411.123,128.967) R6.1@410.657,128.501 ; 410.464,128.967 ccw(c411.123,128.967) R6.1@410.657,128.501 ; 410.464,128.967 ccw(c411.123,128.967) R6.1@410.657,128.501 ; 410.464,130.576 cw(c411.968,130.576) P1.4@410.905,131.639 ; 410.464,130.576 cw(c411.968,130.576) P1.4@410.905,131.639 ; 410.464,130.576 cw(c411.968,130.576) P1.4@410.905,131.639 ; 410.464,131.189 cw(c411.355,131.189) P1.4@410.725,131.819 ; 410.464,131.189 cw(c411.355,131.189) P1.4@410.725,131.819 ; 410.464,131.189 cw(c411.355,131.189) P1.4@410.725,131.819 ; P4.4@417.136,55.813 ccw(c416.072,56.876) 417.576,56.876 ; P4.4@417.136,55.813 ccw(c416.072,56.876) 417.576,56.876 ; P4.4@417.136,55.813 ccw(c416.072,56.876) 417.576,56.876 ; P4.4@417.315,55.633 ccw(c416.685,56.263) 417.576,56.263 ; P4.4@417.315,55.633 ccw(c416.685,56.263) 417.576,56.263 ; P4.4@417.315,55.633 ccw(c416.685,56.263) 417.576,56.263 ; R12.1@417.383,57.935 cw(c416.917,57.469) 417.576,57.469 ; R12.1@417.383,57.935 cw(c416.917,57.469) 417.576,57.469 ; R12.1@417.383,57.935 cw(c416.917,57.469) 417.576,57.469 ; 417.576,56.263 ccw(c418.467,56.263) P4.4@417.837,55.633 ; 417.576,56.263 ccw(c418.467,56.263) P4.4@417.837,55.633 ; 417.576,56.263 ccw(c418.467,56.263) P4.4@417.837,55.633 ; 417.576,56.876 ccw(c419.08,56.876) P4.4@418.017,55.813 ; 417.576,56.876 ccw(c419.08,56.876) P4.4@418.017,55.813 ; 417.576,56.876 ccw(c419.08,56.876) P4.4@418.017,55.813 ; 417.576,57.469 cw(c418.235,57.469) R12.1@417.769,57.935 ; 417.576,57.469 cw(c418.235,57.469) R12.1@417.769,57.935 ; 417.576,57.469 cw(c418.235,57.469) R12.1@417.769,57.935
  other v1: 422.727,97.278 426.454,105.014 430.336,105.217 428.734,105.292 426.461,122.435 429.716,122.5
ICM_INT: U2.6 U3.21 | length 69.4
  Top Layer w0.254: U2.6@401.82,96.556 v1@401.82,97.566 ; v1@421.241,88.272 421.409,88.272 422.314,87.368 423.554,87.368 424.957,88.771 428.149,88.771 428.754,89.376 430.224,89.376 430.616,88.984 U3.21@430.616,87.543 ; v1@401.734,97.518 cw(c401.526,97.31) 401.82,97.31 ; v1@401.734,97.518 cw(c401.526,97.31) 401.82,97.31 ; v1@401.734,97.518 cw(c401.526,97.31) 401.82,97.31 ; v1@421.157,88.213 cw(c421.157,87.461) 421.689,87.992 ; v1@421.157,88.213 cw(c421.157,87.461) 421.689,87.992 ; v1@421.157,88.213 cw(c421.157,87.461) 421.689,87.992
  Bottom Layer w0.254: v1@401.772,97.579 401.481,97.87 391.23,97.87 390.785,97.426 390.785,93.103 391.744,92.145 395.548,92.145 396.202,91.491 396.202,86.865 396.542,86.524 419.187,86.524 420.949,88.286 v1(421.157,88.286) ; 420.677,88.014 cw(c421.157,87.534) v1@421.157,88.213 ; 420.677,88.014 cw(c421.157,87.534) v1@421.157,88.213 ; 420.677,88.014 cw(c421.157,87.534) v1@421.157,88.213
  other v1: 401.785,97.569
ICM_SCL: R17.2 R22.2 U2.2 U3.29 | length 79.2
  Top Layer w0.254: U2.2@402.845,94.496 R17.2@405.728,94.496 ; R17.2@405.892,94.272 406.081,94.083 409.393,94.083 409.862,94.552 R22.2@409.862,95.657 ; v1(409.905,87.388) R22.2@409.905,95.95 ; v1@427.632,80.266 v1(427.648,80.266) v1(434.299,80.266) ; v1@434.616,85.619 U3.29@434.616,87.543 ; 404.692,94.496 cw(c404.692,93.072) R17.2@405.699,94.079 ; 404.692,94.496 cw(c404.692,93.072) R17.2@405.699,94.079 ; 404.692,94.496 cw(c404.692,93.072) R17.2@405.699,94.079 ; 405.305,94.496 cw(c405.305,93.685) R17.2@405.879,94.259 ; 405.305,94.496 cw(c405.305,93.685) R17.2@405.879,94.259 ; 405.305,94.496 cw(c405.305,93.685) R17.2@405.879,94.259 ; R17.2@405.905,94.285 ccw(c406.394,94.774) 406.394,94.083 ; R17.2@405.905,94.285 ccw(c406.394,94.774) 406.394,94.083 ; R17.2@405.905,94.285 ccw(c406.394,94.774) 406.394,94.083 ; R17.2@406.085,94.465 ccw(c407.007,95.387) 407.007,94.083 ; R17.2@406.085,94.465 ccw(c407.007,95.387) 407.007,94.083 ; R17.2@406.085,94.465 ccw(c407.007,95.387) 407.007,94.083 ; R22.2@409.696,95.747 cw(c409.295,95.346) 409.862,95.346 ; R22.2@409.696,95.747 cw(c409.19,95.241) 409.905,95.241 ; R22.2@409.696,95.747 cw(c409.295,95.346) 409.862,95.346 ; R22.2@409.696,95.747 cw(c409.19,95.241) 409.905,95.241 ; R22.2@409.696,95.747 cw(c409.295,95.346) 409.862,95.346 ; R22.2@409.696,95.747 cw(c409.19,95.241) 409.905,95.241 ; 409.862,94.874 cw(c411.096,94.874) R22.2@410.223,95.747 ; 409.862,94.874 cw(c411.096,94.874) R22.2@410.223,95.747 ; 409.862,94.874 cw(c411.096,94.874) R22.2@410.223,95.747 ; 409.862,95.487 cw(c410.483,95.487) R22.2@410.044,95.926 ; 409.862,95.487 cw(c410.483,95.487) R22.2@410.044,95.926 ; 409.862,95.487 cw(c410.483,95.487) R22.2@410.044,95.926 ; 409.905,94.979 cw(c410.991,94.979) R22.2@410.223,95.747 ; 409.905,94.979 cw(c410.991,94.979) R22.2@410.223,95.747 ; 409.905,94.979 cw(c410.991,94.979) R22.2@410.223,95.747
  Bottom Layer w0.254: v1@409.949,87.359 410.345,86.963 418.899,86.963 421.182,89.246 424.362,89.246 424.717,88.891 424.717,80.874 425.325,80.266 v1(427.648,80.266) ; v1@434.315,80.234 434.619,80.538 v1(434.619,85.59) ; v1@409.905,87.315 cw(c409.905,87.104) 410.055,87.253 ; v1@409.905,87.315 cw(c409.905,87.104) 410.055,87.253 ; v1@409.905,87.315 cw(c409.905,87.104) 410.055,87.253 ; v1@434.299,80.339 ccw(c434.299,80.631) 434.506,80.424 ; v1@434.299,80.339 ccw(c434.299,80.631) 434.506,80.424 ; v1@434.299,80.339 ccw(c434.299,80.631) 434.506,80.424
ICM_SDA: R16.1 R19.2 U2.3 U3.55 | length 62.1
  Top Layer w0.254: U2.3@402.845,94.996 405.142,94.996 405.933,95.787 ; R16.1@405.892,96.228 R19.2@407.761,96.228 ; v1@407.927,94.938 R19.2@407.927,96.011 ; v1@424.593,99.827 424.789,100.023 425.814,100.023 ; 425.784,100.023 426.203,100.023 428.555,97.67 432.78,97.67 433.116,98.007 U3.55@433.116,98.943 ; 405.382,95.237 ccw(c404.71,95.91) R16.1@405.628,96.157 ; 405.382,95.237 ccw(c404.71,95.91) R16.1@405.628,96.157 ; 405.382,95.237 ccw(c404.71,95.91) R16.1@405.628,96.157 ; 405.693,95.548 ccw(c405.199,96.041) R16.1@405.874,96.223 ; 405.693,95.548 ccw(c405.199,96.041) R16.1@405.874,96.223 ; 405.693,95.548 ccw(c405.199,96.041) R16.1@405.874,96.223 ; R16.1@406.085,96.035 cw(c406.551,95.569) 406.551,96.228 ; R16.1@406.085,96.035 cw(c406.551,95.569) 406.551,96.228 ; R16.1@406.085,96.035 cw(c406.551,95.569) 406.551,96.228 ; R16.1@406.085,96.421 ccw(c406.551,96.887) 406.551,96.228 ; R16.1@406.085,96.421 ccw(c406.551,96.887) 406.551,96.228 ; R16.1@406.085,96.421 ccw(c406.551,96.887) 406.551,96.228 ; 406.502,96.228 cw(c406.502,94.585) R19.2@407.664,95.747 ; 406.502,96.228 cw(c406.502,94.585) R19.2@407.664,95.747 ; 406.502,96.228 cw(c406.502,94.585) R19.2@407.664,95.747 ; 407.115,96.228 cw(c407.115,95.199) R19.2@407.843,95.926 ; 407.115,96.228 cw(c407.115,95.199) R19.2@407.843,95.926 ; 407.115,96.228 cw(c407.115,95.199) R19.2@407.843,95.926 ; R19.2@407.664,95.747 cw(c407.027,95.11) 407.927,95.11 ; R19.2@407.664,95.747 cw(c407.027,95.11) 407.927,95.11 ; R19.2@407.664,95.747 cw(c407.027,95.11) 407.927,95.11 ; 407.927,95.11 cw(c408.828,95.11) R19.2@408.191,95.747 ; 407.927,95.11 cw(c408.828,95.11) R19.2@408.191,95.747 ; 407.927,95.11 cw(c408.828,95.11) R19.2@408.191,95.747 ; 407.927,95.142 ccw(c408.269,95.142) v1@408.028,94.9 ; 407.927,95.142 ccw(c408.269,95.142) v1@408.028,94.9 ; 407.927,95.142 ccw(c408.269,95.142) v1@408.028,94.9 ; v1@424.641,99.761 cw(c425.274,99.128) 425.274,100.023 ; v1@424.641,99.761 cw(c425.274,99.128) 425.274,100.023 ; v1@424.641,99.761 cw(c425.274,99.128) 425.274,100.023
  Bottom Layer w0.254: v1@408.13,94.776 408.191,94.715 411.131,94.715 411.144,94.701 ; 411.126,94.715 412.58,94.715 412.787,94.923 412.787,96.16 412.792,96.155 412.91,96.273 424.264,96.273 424.565,96.573 v1@424.565,99.839 ; v1@408.028,94.9 ccw(c408.475,95.348) 408.475,94.715 ; v1@408.028,94.9 ccw(c408.475,95.348) 408.475,94.715 ; v1@408.028,94.9 ccw(c408.475,95.348) 408.475,94.715 ; 424.565,99.577 cw(c424.825,99.577) v1@424.641,99.761 ; 424.565,99.577 cw(c424.825,99.577) v1@424.641,99.761 ; 424.565,99.577 cw(c424.825,99.577) v1@424.641,99.761
  other v1: 407.976,94.849 424.589,99.812
JTCK: P11.2 U3.49 | length 27.5
  Top Layer w0.254: U3.49@436.116,98.943 436.116,100.518 436.422,100.824 439.154,100.824 439.604,101.273 439.604,105.774 438.914,106.464 438.914,108.083 439.554,108.724 441.354,108.724 442.454,109.823 442.989,109.823 P11.2@442.695,110.116 ; 441.726,109.095 cw(c442.976,107.845) P11.2@442.976,109.613 ; 441.726,109.095 cw(c442.976,107.845) P11.2@442.976,109.613 ; 441.726,109.095 cw(c442.976,107.845) P11.2@442.976,109.613 ; 441.99,109.359 ccw(c441.113,110.236) P11.2@442.353,110.236 ; 441.99,109.359 ccw(c441.113,110.236) P11.2@442.353,110.236 ; 441.99,109.359 ccw(c441.113,110.236) P11.2@442.353,110.236 ; 442.159,109.529 cw(c442.976,108.712) P11.2@442.976,109.867 ; 442.159,109.529 cw(c442.976,108.712) P11.2@442.976,109.867 ; 442.159,109.529 cw(c442.976,108.712) P11.2@442.976,109.867
JTMS: P11.3 U3.46 | length 33.9
  Top Layer w0.254: U3.46@438.066,95.993 v1@440.282,95.993 ; 440.123,95.993 ccw(c440.123,96.222) v1@440.285,96.06 ; 440.123,95.993 ccw(c440.123,96.222) v1@440.285,96.06 ; 440.123,95.993 ccw(c440.123,96.222) v1@440.285,96.06
  Bottom Layer w0.254: v1@440.305,96.025 440.348,95.982 445.128,95.982 445.523,96.376 445.523,101.416 ; 445.516,101.43 P11.3@445.516,110.236 ; v1@440.388,96.06 ccw(c440.576,96.248) 440.576,95.982 ; v1@440.388,96.06 ccw(c440.576,96.248) 440.576,95.982 ; v1@440.388,96.06 ccw(c440.576,96.248) 440.576,95.982 ; P11.3@445.075,109.795 cw(c444.012,108.732) 445.516,108.732 ; P11.3@445.075,109.795 cw(c444.012,108.732) 445.516,108.732 ; P11.3@445.075,109.795 cw(c444.012,108.732) 445.516,108.732 ; P11.3@445.255,109.975 cw(c444.625,109.345) 445.516,109.345 ; P11.3@445.255,109.975 cw(c444.625,109.345) 445.516,109.345 ; P11.3@445.255,109.975 cw(c444.625,109.345) 445.516,109.345 ; 445.516,108.732 cw(c447.02,108.732) P11.3@445.957,109.795 ; 445.516,108.732 cw(c447.02,108.732) P11.3@445.957,109.795 ; 445.516,108.732 cw(c447.02,108.732) P11.3@445.957,109.795 ; 445.516,109.345 cw(c446.407,109.345) P11.3@445.777,109.975 ; 445.516,109.345 cw(c446.407,109.345) P11.3@445.777,109.975 ; 445.516,109.345 cw(c446.407,109.345) P11.3@445.777,109.975
  other v1: 440.337,96.008
LED0: R28.1 U3.50 | length 8.9
  Top Layer w0.254: U3.50@435.616,98.943 R28.1@435.616,102.197 ; 435.616,101.066 cw(c437.122,101.066) R28.1@436.057,102.131 ; 435.616,101.066 cw(c437.122,101.066) R28.1@436.057,102.131 ; 435.616,101.066 cw(c437.122,101.066) R28.1@436.057,102.131 ; 435.616,101.679 cw(c436.509,101.679) R28.1@435.877,102.311 ; 435.616,101.679 cw(c436.509,101.679) R28.1@435.877,102.311 ; 435.616,101.679 cw(c436.509,101.679) R28.1@435.877,102.311
MOTOR1_INL: M1.3 U3.26 | length 15.6
  Top Layer w0.254: U3.26@433.116,87.543 433.116,89.91 v1@433.706,90.5 ; v1(442.728,90.548) M1.3@443.554,90.548 ; 443.049,90.548 cw(c443.049,89.792) M1.3@443.584,90.327 ; 443.049,90.548 cw(c443.049,89.792) M1.3@443.584,90.327 ; 443.049,90.548 cw(c443.049,89.792) M1.3@443.584,90.327
  Bottom Layer w0.254: v1@433.692,90.548 v1(442.728,90.548) v1@442.769,90.548 ; v1@433.757,90.462 cw(c433.965,90.255) 433.965,90.548 ; v1@433.757,90.462 cw(c433.965,90.255) 433.965,90.548 ; v1@433.757,90.462 cw(c433.965,90.255) 433.965,90.548
  other v1: 433.706,90.514
MOTOR1_INR: M1.4 U3.27 | length 18.4
  Top Layer w0.254: U3.27@433.616,87.543 v1@433.616,88.958 ; M1.4@443.738,87.63 v1@443.738,88.867 ; 433.616,88.639 cw(c434.122,88.639) v1@433.764,88.996 ; 433.616,88.639 cw(c434.122,88.639) v1@433.764,88.996 ; 433.616,88.639 cw(c434.122,88.639) v1@433.764,88.996 ; M1.4@443.616,88.002 ccw(c443.32,88.298) 443.738,88.298 ; M1.4@443.616,88.002 ccw(c443.32,88.298) 443.738,88.298 ; M1.4@443.616,88.002 ccw(c443.32,88.298) 443.738,88.298 ; v1@443.654,88.824 cw(c443.45,88.621) 443.738,88.621 ; v1@443.654,88.824 cw(c443.45,88.621) 443.738,88.621 ; v1@443.654,88.824 cw(c443.45,88.621) 443.738,88.621 ; 443.738,88.298 ccw(c444.156,88.298) M1.4@443.86,88.002 ; 443.738,88.298 ccw(c444.156,88.298) M1.4@443.86,88.002 ; 443.738,88.298 ccw(c444.156,88.298) M1.4@443.86,88.002
  Bottom Layer w0.254: v1(433.712,89.048) 443.485,89.048 v1@443.698,88.835 ; 443.114,89.048 cw(c443.114,88.284) v1@443.654,88.824 ; 443.114,89.048 cw(c443.114,88.284) v1@443.654,88.824 ; 443.114,89.048 cw(c443.114,88.284) v1@443.654,88.824
  other v1: 443.705,88.876
MOTOR2_INL: M2.3 U3.14 | length 37.1
  Top Layer w0.254: M2.3@394.494,86.843 394.494,86.561 v1@395.41,85.645 ; v1@422.632,88.032 425.093,90.493 U3.14@426.666,90.493 ; M2.3@394.494,86.42 cw(c394.494,86.079) M2.3@394.735,86.32 ; M2.3@394.494,86.42 cw(c394.494,86.079) M2.3@394.735,86.32 ; M2.3@394.494,86.42 cw(c394.494,86.079) M2.3@394.735,86.32 ; M2.3@394.667,86.593 ccw(c395.161,86.593) 394.812,86.243 ; M2.3@394.667,86.593 ccw(c395.161,86.593) 394.812,86.243 ; M2.3@394.667,86.593 ccw(c395.161,86.593) 394.812,86.243 ; 395.263,85.793 ccw(c395.442,85.972) v1@395.442,85.718 ; 395.263,85.793 ccw(c395.442,85.972) v1@395.442,85.718 ; 395.263,85.793 ccw(c395.442,85.972) v1@395.442,85.718
  Bottom Layer w0.254: v1@395.555,85.641 420.25,85.641 v1@422.553,87.944
  other v1: 395.442,85.645 422.581,87.973
MOTOR2_INR: M2.4 U3.15 | length 39.5
  Top Layer w0.254: M2.4@394.462,89.662 394.618,89.818 395.24,89.818 v1@395.507,89.551 ; v1@424.065,88.692 424.065,88.807 425.251,89.993 U3.15@426.666,89.993 ; M2.4@394.584,90.034 ccw(c395.108,90.558) 395.108,89.818 ; M2.4@394.584,90.034 ccw(c395.108,90.558) 395.108,89.818 ; M2.4@394.584,90.034 ccw(c395.108,90.558) 395.108,89.818 ; v1@424.074,88.687 cw(c424.385,88.687) 424.165,88.907 ; v1@424.074,88.687 cw(c424.385,88.687) 424.165,88.907 ; v1@424.074,88.687 cw(c424.385,88.687) 424.165,88.907
  Bottom Layer w0.254: v1(395.571,89.486) 395.571,86.684 396.185,86.07 419.901,86.07 422.076,88.245 422.518,88.687 v1(424.001,88.687)
NetC2_1: C2.1 U2.14 | length 7.7
  Top Layer w0.254: C2.1@399.644,89.617 399.644,92.745 400.345,93.446 U2.14@400.82,93.446 ; C2.1@399.446,89.66 ccw(c398.968,90.138) 399.644,90.138 ; C2.1@399.446,89.66 ccw(c398.968,90.138) 399.644,90.138 ; C2.1@399.446,89.66 ccw(c398.968,90.138) 399.644,90.138 ; 399.644,90.114 ccw(c400.286,90.114) C2.1@399.832,89.66 ; 399.644,90.114 ccw(c400.286,90.114) C2.1@399.832,89.66 ; 399.644,90.114 ccw(c400.286,90.114) C2.1@399.832,89.66
NetC6_1: C6.1 M1.6 P5.1 | length 28.7
  Top Layer w0.4: M1.6@445.606,87.649 M1.6@445.716,87.539 ; M1.6@445.815,87.592 C6.1@448.056,87.592 ; P5.1@450.8,88.315 450.077,87.592 C6.1@448.056,87.592 ; M1.6@445.677,87.72 ccw(c445.985,88.028) 445.985,87.592 ; M1.6@445.677,87.72 ccw(c445.985,88.028) 445.985,87.592 ; M1.6@445.677,87.72 ccw(c445.985,88.028) 445.985,87.592 ; 447.573,87.592 ccw(c447.573,88.075) C6.1@447.915,87.733 ; 447.573,87.592 cw(c447.573,87.109) C6.1@447.915,87.451 ; 447.573,87.592 ccw(c447.573,88.075) C6.1@447.915,87.733 ; 447.573,87.592 cw(c447.573,87.109) C6.1@447.915,87.451 ; 447.573,87.592 ccw(c447.573,88.075) C6.1@447.915,87.733 ; 447.573,87.592 cw(c447.573,87.109) C6.1@447.915,87.451 ; C6.1@448.056,87.592 ccw(c448.056,90.106) P5.1@450.14,88.7 ; C6.1@448.056,87.592 ccw(c448.056,90.106) P5.1@450.14,88.7 ; C6.1@448.056,87.592 ccw(c448.056,90.106) P5.1@450.14,88.7 ; C6.1@448.197,87.451 cw(c448.539,87.109) 448.539,87.592 ; C6.1@448.197,87.451 cw(c448.539,87.109) 448.539,87.592 ; C6.1@448.197,87.451 cw(c448.539,87.109) 448.539,87.592 ; C6.1@448.197,87.733 ccw(c448.539,88.075) 448.539,87.592 ; C6.1@448.197,87.733 ccw(c448.539,88.075) 448.539,87.592 ; C6.1@448.197,87.733 ccw(c448.539,88.075) 448.539,87.592 ; 448.809,87.592 ccw(c448.809,89.598) P5.1@450.472,88.476 ; 448.809,87.592 ccw(c448.809,89.598) P5.1@450.472,88.476 ; 448.809,87.592 ccw(c448.809,89.598) P5.1@450.472,88.476 ; 449.561,87.592 ccw(c449.561,89.09) P5.1@450.803,88.252 ; 449.561,87.592 ccw(c449.561,89.09) P5.1@450.803,88.252 ; 449.561,87.592 ccw(c449.561,89.09) P5.1@450.803,88.252